# Altium PCB pneu-sensor.PcbDoc
Units mil, origin at the board's own origin, x right, y up, seen from the top; angles counter-clockwise.
Board outline 1200 x 2000 mil, 2 copper layers (Top, Bottom); 18 components, 11 nets, 64 pads, 22 vias.
Unrouted connection lines stored in the file: 4.
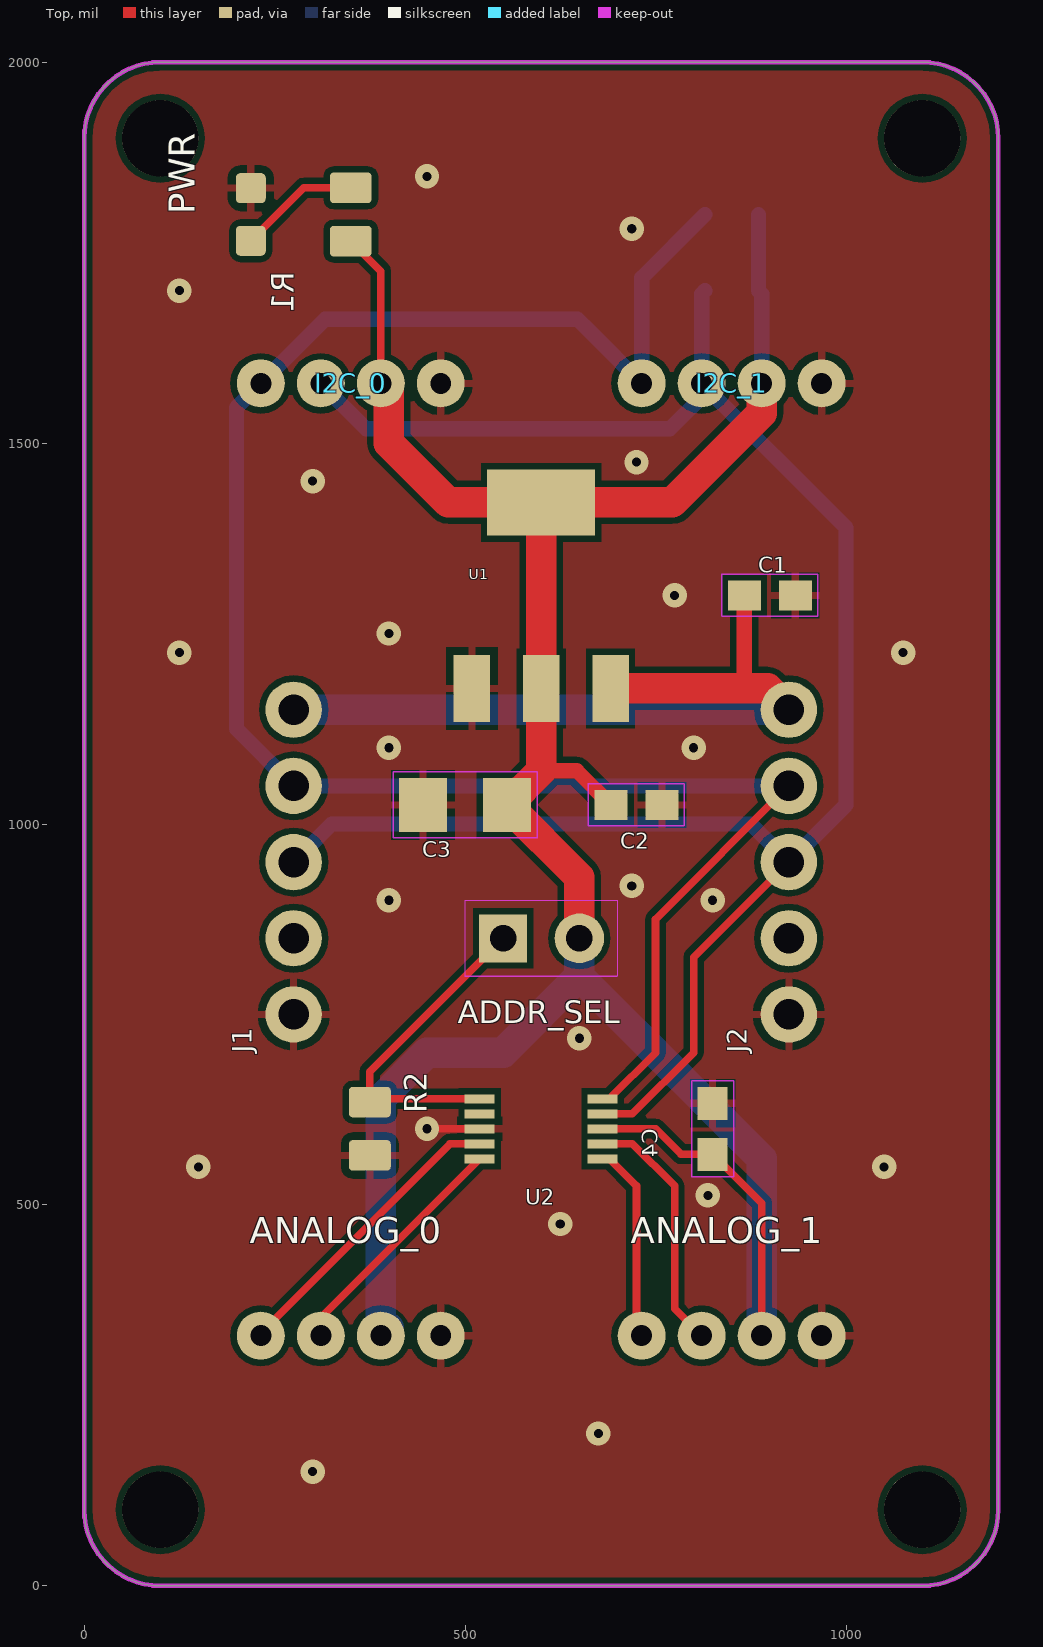
[diagram p0: Top view]
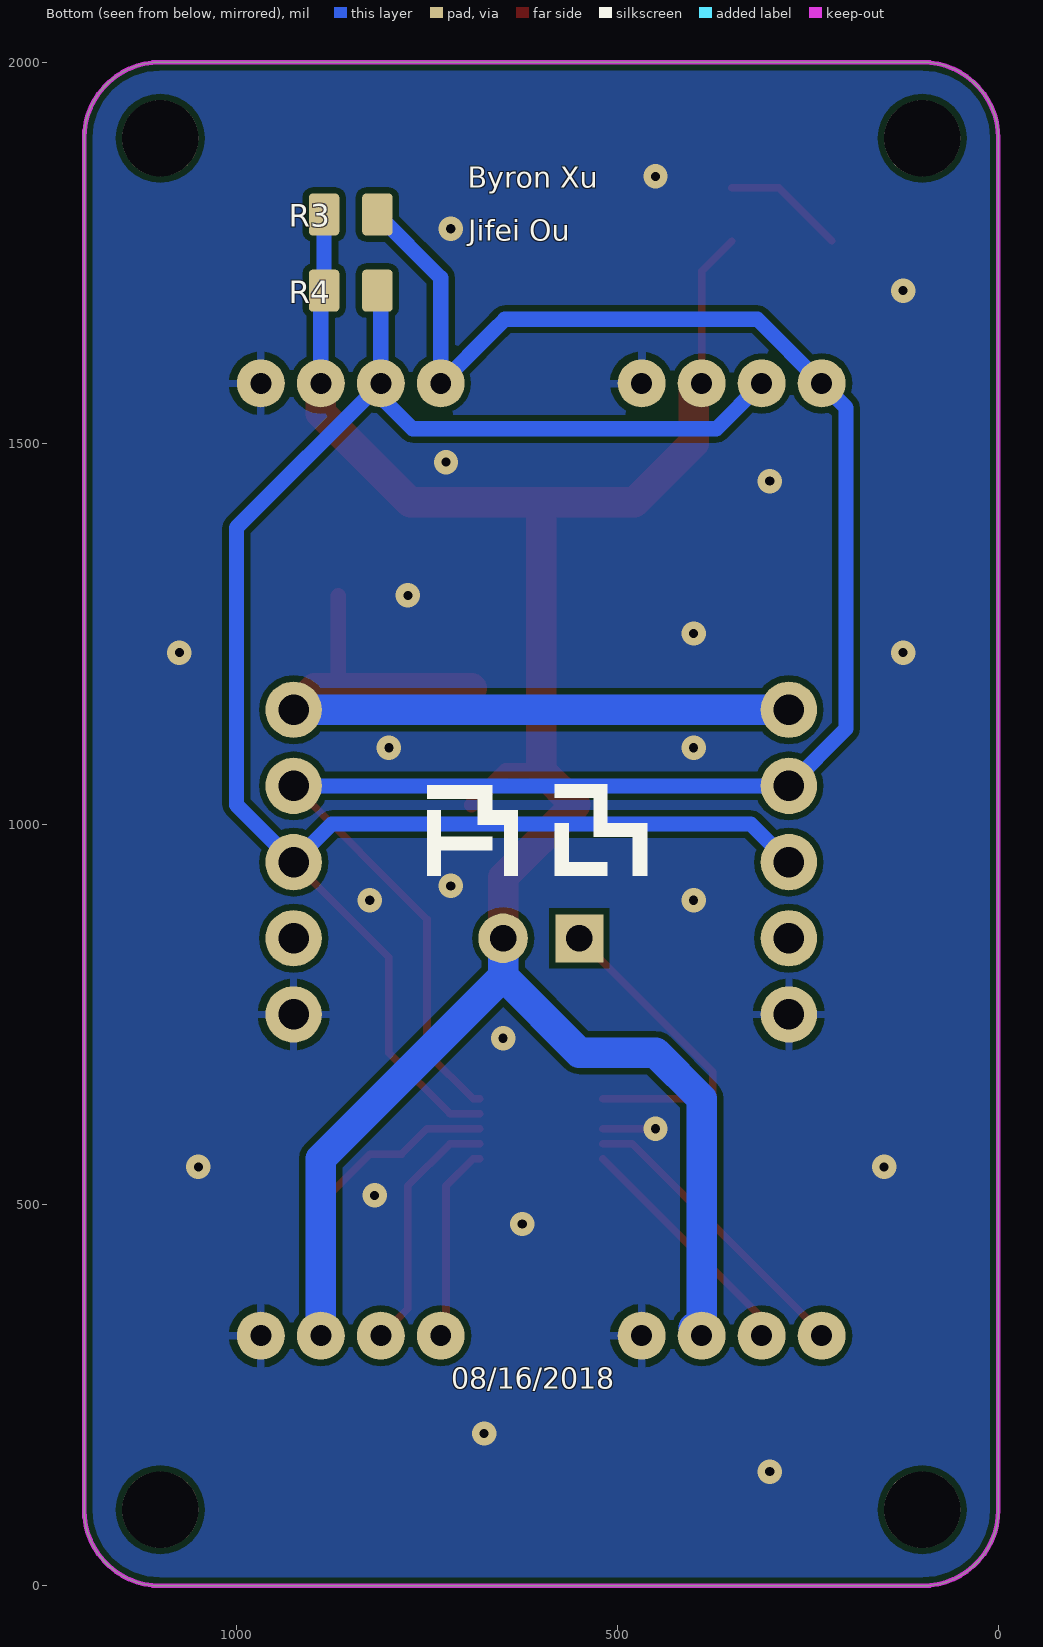
[diagram p1: Bottom view, seen from below]

## Layer stack, top to bottom
Top Solder: solder mask 0.4, Solder Resist, Dk 3.5
Top: signal copper 1.378
Dielectric 1: dielectric 12.6, FR-4, Dk 4.8
Bottom: signal copper 1.378
Bottom Solder: solder mask 0.4, Solder Resist, Dk 3.5

## Board outline
100,0 cw(c100,100) 0,100 0,1900 cw(c100,1900) 100,2000 1100,2000 cw(c1100,1900) 1200,1900 1200,100 cw(c1100,100) 1100,0

## Design rules (kind name [scope] priority, off if disabled: settings)
Clearance "Clearance (Same Net)" [All] p1: gap=8 ignorepadtopadclearanceinfootprint=FALSE
Clearance [All] p2: gap=8 ignorepadtopadclearanceinfootprint=FALSE except(15: Arc-Poly Track-Poly SMDPad-Poly THPad-Poly Via-Poly Fill-Poly Poly-Poly Poly-Region Poly-Text Poly-Hole)
HoleSize [All] p1: absolutevalues=TRUE maxlimit=100000 minlimit=20 maxpercent=80.000 minpercent=20.000
HoleToHoleClearance mdDrill [All] p1: gap=8 allowstackedmicrovias=TRUE
PasteMaskExpansion Expansion_SMDPaste_OFF [InPadClass('SMDPaste_OFF')] p1: expansion=0
PasteMaskExpansion mlMinCreamFrame [All] p2: expansion=0
PolygonConnect ThermalVias [IsVia] p1: connectstyle=Direct reliefconductorwidth=10 reliefentries=4 polygonreliefangle="90 Angle" airgapwidth=10
PolygonConnect [All] p2: connectstyle=Relief reliefconductorwidth=10 reliefentries=4 polygonreliefangle="90 Angle" airgapwidth=10
RoutingVias [All] p1: holewidth=20 width=40 viastyle="Through Hole" minholewidth=20 minwidth=40 maxholewidth=100 maxwidth=100
SolderMaskExpansion Expansion_SMDSolder_OFF [InPadClass('SMDSolder_OFF')] p1: expansion=0
SolderMaskExpansion mlMinStopFrame [All] p2: expansion=4
Width [All] p1: maxlimit=10000 minlimit=8 preferedwidth=8
27 further rules are at their usual default settings.

## Classes and differential pairs
polygon class Isolate_15: Polygon_1_Net_GND Polygon_2_Net_GND
pad class SMDSolder_OFF: U2-1 U2-2 U2-3 U2-4 U2-5 U2-6 U2-7 U2-8 U2-9 U2-10
pad class SMDPaste_OFF: U2-1 U2-2 U2-3 U2-4 U2-5 U2-6 U2-7 U2-8 U2-9 U2-10

## Components (designator, comment, footprint, x,y, rotation, side; value= is the part's Value field where it differs from the comment)
ADDR_SEL "" H2-2.54 500,850 r90 top
ANALOG_0 "" JST-4-PTH-VERT 250,350 r0 top
ANALOG_1 "" JST-4-PTH-VERT 750,350 r0 top
C1 "0.1uF" 0603#1 800,1300 r0 top
C2 "0.1uF" 0603#1 625,1025 r0 top
C3 "22uF" 1206 400,1025 r180 top
C4 "0.1uF" 0603#2 725,600 r90 top
I2C_0 "" JST-4-PTH-VERT 250,1600 r0 top
I2C_1 "" JST-4-PTH-VERT 750,1600 r0 top
J1 "" 1X05 175,750 r90 top
J2 "" 1X05 825,750 r90 top
PWR "RED" LED-0603 118.75,1800 r90 top
R1 "1K" R0805#1 250,1800 r180 top
R2 "10K" R0805#2 275,600 r0 top
R3 "10K" R0805#3 750,1800 r270 bottom
R4 "10K" R0805#3 750,1700 r270 bottom
U1 "V_REG_LD1117V5" SOT223 500,1300 r0 top
U2 "ADS1015" MSOP10 500,600 r270 top

## Footprints (in the part's own frame and the unit in brackets; to place one, negate y for a bottom-side part, rotate by r counter-clockwise, add the part's x,y. Pads: shape width x height; smd on the part's side, far side on the other; paste and mask are expansions set on the pad)
1X05 [mil] "1X05"
  round 74 / inner round 60 / far side round 74 hole 40: 1(0,-100) 2(100,-100) 3(200,-100) 4(300,-100) 5(400,-100)
0603#1 [mm] "0603"
  rect 1.1x1 smd: 1(1.69,0) 2(3.39,0)
  Top keep-out lines w0.051: 0.94,-0.7 0.94,0.7 4.14,0.7 4.14,-0.7 0.94,-0.7
0603#2 [mm] "0603"
  rect 1.1x1 smd: 1(-0.85,-2.54) 2(0.85,-2.54)
  Top keep-out lines w0.051: -1.6,-1.84 -1.6,-3.24 1.6,-3.24 1.6,-1.84 -1.6,-1.84
1206 [mil] "1206"
  rect 62.99x70.87 smd: 1(-155.12,0) 2(-44.88,0)
  Top keep-out lines w2: -5.51,43.31 -5.51,-43.31 -194.49,-43.31 -194.49,43.31 -5.51,43.31
H2-2.54 [mil] "H2-2.54"
  rect 62.94x62.94 / inner rect 60x60 / far side rect 62.94x62.94 hole 35: 1(0,-50)
  round 65 / inner round 60 / far side round 65 hole 35: 2(0,-150)
  Top keep-out region: -50,-200 -50,0 50,0 50,-200
  Top keep-out lines w0: -50,-200 -50,0 50,0 50,-200
JST-4-PTH-VERT [mm] "JST-4-PTH-VERT"
  round 1.6 / inner round 1.524 / far side round 1.6 hole 0.7: 1(-0.46,-0.55) 2(1.54,-0.55) 3(3.54,-0.55) 4(5.54,-0.55)
LED-0603 [mm] "LED-0603"
  rrect30% 1x1 smd: A(-0.877,-2.54) C(0.877,-2.54)
MSOP10 [mm] "MSOP10"
  rect 0.3x1 smd paste+0 mask+0: 1(-1,0.49) 2(-0.5,0.49) 3(0,0.49) 4(0.5,0.49) 5(1,0.49) 6(1,4.59) 7(0.5,4.59) 8(0,4.59) 9(-0.5,4.59) 10(-1,4.59)
R0805#1 [mil] "R0805"
  rrect25% 55x40 smd: 1(-100,35) 2(-100,-35)
R0805#2 [mil] "R0805"
  rrect25% 55x40 smd: 1(100,35) 2(100,-35)
R0805#3 [mil] "R0805"
  rrect25% 55x40 smd: 1(0,-65) 2(0,-135)
SOT223 [mil] "SOT223"
  rect 48x88 smd: 1(9,-122) 2(100,-122) 3(191,-122)
  rect 141.73x86.61 smd: 4(100,122.01)

## Part data
ADDR_SEL: library part H2-2.54, PackageName=H2-2.54
ANALOG_0 ANALOG_1 I2C_0 I2C_1: library part JST-4-PTH-VERT, PackageName=JST-4-PTH-VERT
C1 C2 C4: library part 0603, PackageName=0603
C3: library part 1206, PackageName=1206
J1 J2: library part 1X05, PackageName=1X05
PWR: library part LED-0603, PackageName=LED-0603
R1 R2 R3 R4: library part R0805, PackageName=R0805
U1: library part SOT223, PackageName=SOT223
U2: library part MSOP10, PackageName=MSOP10

## Free pads (board coordinates)
  round 100 hole 100 unplated: MH1(100,1900) MH2(1100,1900) MH3(1100,100) MH4(100,100)

## Via types
v1: diameter 32/32 (per signal layer), hole 12, Top to Bottom, tented both sides, 22 vias

## Nets (pads, with @x,y where several pads share a name; then routed paths per layer and width w, separated by ;. In a path a pad name is that pad's centre, name@x,y a point inside that pad or via, vN(x,y) a via of type N, cw(c..) or ccw(c..) an arc to the next point about the centre after c; other vN are vias at no path point)
12V: C1.1 J1.5 J2.5 U1.3 | length 1024.4
  Top w20: 850,1178 866.54,1194.54 C1.1
  Top w40: U1.3 850,1178 897,1178 J2.5
  Bottom w40: J1.5 J2.5
+5V: ADDR_SEL.2 ANALOG_0.3 ANALOG_1.3 C2.1 C3.1 C4.1 I2C_0.3 I2C_1.3 R1.1 R3.1 R4.1 U1.2 U1.4 U2.8 | length 3555.5
  Top w10: R1.1 389.37,1725.63 I2C_0.3 ; U2.8 750,600 783.46,566.54 C4.1 889.37,502.17 ANALOG_1.3
  Top w20: 600,1069.88 646.65,1069.88 C2.1
  Top w40: I2C_0.3 400,1567.72 400,1500 477.99,1422.01 U1.4 ; ADDR_SEL.2 650,930.12 C3.1 600,1069.88 U1.2 U1.4 ; I2C_1.3 889.37,1539.37 772.01,1422.01 U1.4
  Bottom w20: 885,1800 885,1765 885,1700 889.37,1695.63 I2C_1.3
  Bottom w40: ANALOG_0.3@400,338.98 ANALOG_0.3 389.37,639.37 450,700 550,700 650,800 ; ADDR_SEL.2 650,800 ; ANALOG_1.3 889.37,560.63 650,800
A0: ANALOG_0.1 U2.4 | length 393.8
  Top w10: ANALOG_0.1 231.89,331.89 480.32,580.32 U2.4
A1: ANALOG_0.2 U2.5 | length 318.7
  Top w10: ANALOG_0.2 310.63,351.97 U2.5
A2: ANALOG_1.1 U2.6 | length 258.6
  Top w10: U2.6 689.37,560.63 725,525 725,335.24 ANALOG_1.1
A3: ANALOG_1.2 U2.7 | length 328.6
  Top w10: U2.7 719.68,580.32 775,525 775,363.98 ANALOG_1.2
GND: ANALOG_0.4 ANALOG_1.4 C1.2 C2.2 C3.2 C4.2 I2C_0.4 I2C_1.4 J1.1 J2.1 PWR.C R2.2 U1.1 U2.3 | length 69.3
  Top w10: v1(450,600) U2.3
  other v1: 300,150 675,200 625,475 818.75,512.5 150,550 1050,550 650,718.75 400,900 825,900 718.75,918.75 400,1100 800,1100 125,1225 1075,1225 400,1250 775,1300 300,1450 725,1475 125,1700 718.75,1781.25 450,1850
N$2: ADDR_SEL.1 R2.1 U2.1 | length 433.6
  Top w10: U2.1 379.37,639.37 R2.1 375,675 ADDR_SEL.1
N$3: PWR.A R1.2 | length 160.1
  Top w10: PWR.A 288.28,1835 R1.2
SCL: I2C_0.1 I2C_1.1 J1.4 J2.4 R3.2 U2.10 | length 2565.3
  Top w10: U2.10 689.37,639.37 750,700 750,875 J2.4
  Bottom w20: 815,1800 731.89,1716.89 I2C_1.1 662.62,1647.62 647.74,1662.5 316.04,1662.5 I2C_0.1 200,1546.46 200,1125 J1.4 J2.4
SDA: I2C_0.2 I2C_1.2 J1.3 J2.3 R4.2 U2.9 | length 2566.8
  Top w10: U2.9 719.68,619.68 800,700 800,825 J2.3
  Bottom w20: J1.3 325,1000 875,1000 J2.3 1000,1025 1000,1388.98 I2C_1.2 ; I2C_0.2 370.23,1518.75 518.75,1518.75 681.25,1518.75 768.75,1518.75 810.63,1560.63 I2C_1.2 ; 815,1700 810.63,1695.63 I2C_1.2
pads on no net: J1.2 J2.2 U2.2

## Polygon pours and split planes (outlines as drawn)
GND on Top "Polygon_1_Net_GND" (solid, remove dead copper, pour order 1): -5,2005 -5,-5 1205,-5 1205,2005
GND on Bottom "Polygon_2_Net_GND" (solid, remove dead copper, pour order 0): -5,2005 -5,-5 1205,-5 1205,2005

## Keep-outs
Keep-Out Layer:
  the board outline again, w6

## Silkscreen, mask and mechanical layers (free items; w line width, h text height)
Bottom Overlay:
  drawing of 354 lines, arcs and shapes, not listed
  text "Byron Xu" at 696.39,1825.64 h46.5
  text "Jifei Ou" at 695.53,1756.01 h46.5
  text "08/16/2018" at 718.43,249.26 h46.5
Dimension:
  the board outline again, w6
Top Assembly:
  text "I2C" at 550,1725 h59.5
  text "SCL SDA" at 206.25,1637.5 h38.75
  text "5V  GND" at 368.75,1637.5 h38.75
  text "SCL SDA" at 706.25,1637.5 h38.75
  text "5V  GND" at 868.75,1637.5 h38.75
  text "A0   A1" at 212.5,387.5 h38.75
  text "5V  GND" at 368.75,387.5 h38.75
  text "A2   A3" at 712.5,387.5 h38.75
  text "5V  GND" at 868.75,387.5 h38.75
  text "ANALOG" at 425,100 h59.5